# Altium PCB fan-regulator.PcbDoc
Units mm, origin at the board's own origin, x right, y up, seen from the top; angles counter-clockwise.
Board outline 152.4 x 101.6 mm, 2 copper layers (Top Layer, Bottom Layer); 23 components, 11 nets, 67 pads, 0 vias.
Unrouted connection lines stored in the file: 35.
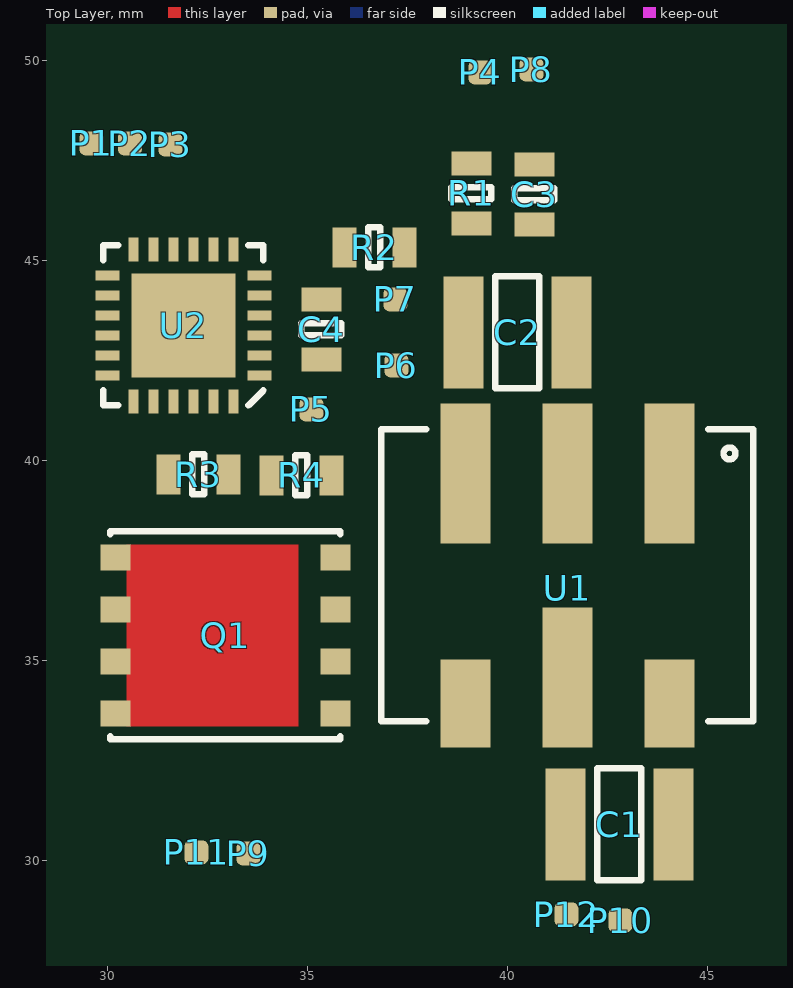
[diagram p0: Top Layer view]
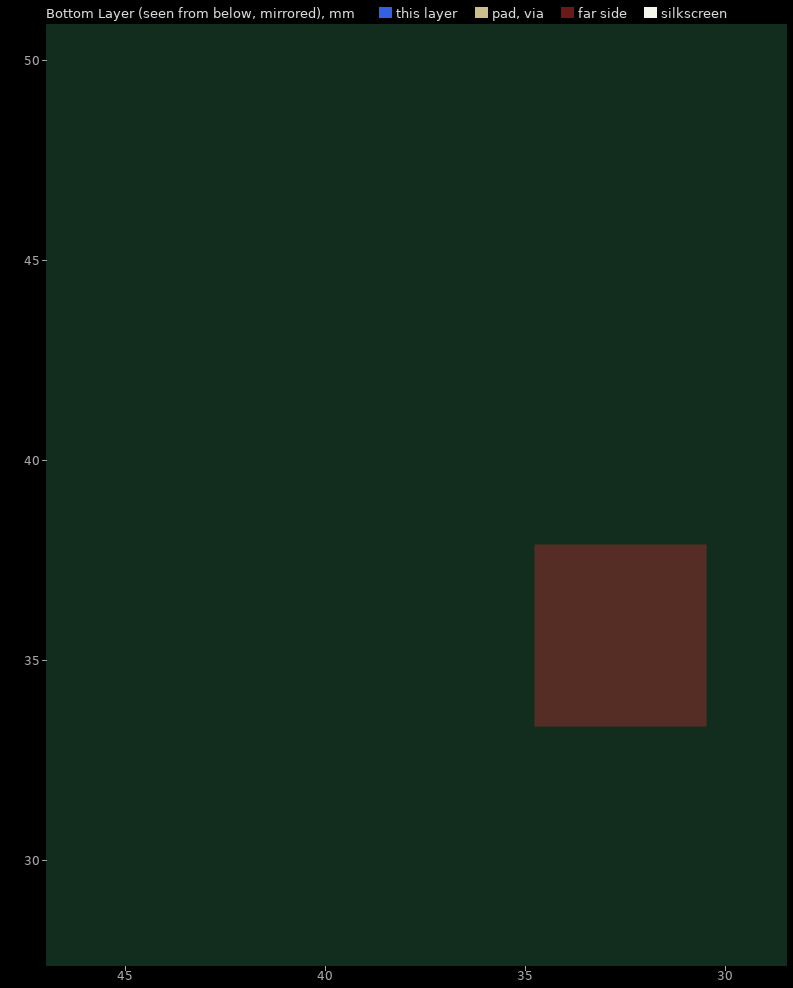
[diagram p1: Bottom Layer view, seen from below]

## Layer stack, top to bottom
Top Solder: solder mask 0.0102, Solder Resist, Dk 3.5
Top Layer: signal copper 0.0356
Dielectric 1: dielectric 0.32, FR-4, Dk 4.8
Bottom Layer: signal copper 0.0356
Bottom Solder: solder mask 0.0102, Solder Resist, Dk 3.5

## Board outline
25.4,25.4 177.8,25.4 177.8,127 25.4,127

## Design rules (kind name [scope] priority, off if disabled: settings)
Clearance [All] p1: gap=0.2 ignorepadtopadclearanceinfootprint=TRUE except(0: Arc-Hole Track-Hole SMDPad-Hole THPad-Hole Via-Hole Fill-Hole Poly-Hole Region-Hole Text-Hole)
ComponentClearance [All] p1: gap=0 collisioncheckmode=3 verticalgap=0 showdistances=FALSE
HoleSize [All] p1: absolutevalues=TRUE maxlimit=5 minlimit=0.3 maxpercent=80.000 minpercent=20.000
MinimumSolderMaskSliver [All] p1: minsoldermaskwidth=0.127
PolygonConnect [All] p1: connectstyle=Direct reliefconductorwidth=0.254 reliefentries=4 polygonreliefangle="90 Angle" airgapwidth=0.254
RoutingVias [All] p1: holewidth=0.5 width=1 viastyle="Through Hole" minholewidth=0.3 minwidth=0.6 maxholewidth=5 maxwidth=6
SilkToSilkClearance [All] p1: silktosilkclearance=0.127
SilkToSolderMaskClearance [IsPad] p1: minsilkscreentomaskgap=0.127 clearancetoexposedcopper=TRUE
SolderMaskExpansion [All] p1: expansion=0.102 istentingtop=FALSE
Width [All] p1: maxlimit=6.3 minlimit=0.2 preferedwidth=0.2 minimp=50.000000 maximp=50.000000 favimp=50.000000
25 further rules are at their usual default settings.

## Components (designator, comment, footprint, x,y, rotation, side; value= is the part's Value field where it differs from the comment)
C1 "22 μF" 1210 41.45,30.9 r0 top
C2 "22 μF" 1210 38.9,43.2 r0 top
C3 "0.1 μF" 0603 40.675,45.9 r90 top
C4 "1 μF" 0603 35.35,44.025 r270 top
P1 "1-Signal" 1-SignalSmall 29.6,47.925 r0 top
P2 "1-Signal" 1-SignalSmall 30.559,47.926 r0 top
P3 "1-Signal" 1-SignalSmall 31.575,47.9 r0 top
P4 "1-Signal" 1-SignalSmall 39.325,49.7 r0 top
P5 "1-Signal" 1-SignalSmall 35.1,41.275 r0 top
P6 "1-Signal" 1-SignalSmall 37.225,42.375 r0 top
P7 "1-Signal" 1-SignalSmall 37.2,44.025 r0 top
P8 "1-Signal" 1-SignalSmall 40.6,49.775 r0 top
P9 "1-Signal" 1-SignalSmall 33.525,30.175 r0 top
P10 "1-Signal" 1-SignalSmall 42.825,28.5 r90 top
P11 "1-Signal" 1-SignalSmall 32.225,30.2 r90 top
P12 "1-Signal" 1-SignalSmall 41.475,28.65 r90 top
Q1 "CSD17307Q5A" "SON Q5A" 35.7,33.675 r90 top
R1 "1 k" 0603 39.1,47.425 r270 top
R2 "62" 0603 35.925,45.325 r0 top
R3 "62" 0603 31.525,39.65 r0 top
R4 "10 k" 0603 35.6,39.625 r180 top
U1 "K7805MT-500R4" K78xxMT-500R4 44.05,39.675 r180 top
U2 "ATtiny1617" VQFN24 33.8,42.125 r180 top

## Footprints (in the part's own frame and the unit in brackets; to place one, negate y for a bottom-side part, rotate by r counter-clockwise, add the part's x,y. Pads: shape width x height; smd on the part's side, far side on the other; paste and mask are expansions set on the pad)
1-SignalSmall [mm]
  rrect50% 0.6x0.6 smd paste-1: 1(0,0)
0603 [mm]
  rect 0.6x1 smd: 1(0,0) 2(1.5,0)
  silkscreen extent 0.6,-0.5 0.9,0.5
1210 [mm]
  rect 1x2.8 smd: 1(0,0) 2(2.7,0)
  silkscreen extent 0.8,-1.4 1.9,1.4
K78xxMT-500R4 [mm]
  rect 1.25x3.5 smd paste-1: 1(0,0) 2(2.55,0) 3(5.1,0) 5(2.55,5.1)
  rect 1.25x2.2 smd paste-1: 4(5.1,5.75) 6(0,5.75)
  silkscreen extent -2.1,-1.1 7.2,6.2
"SON Q5A" [mm]
  rect 0.65x0.75 smd paste-1: 1(0,0) 2(1.3,0) 3(2.6,0) 4(3.9,0) 5(3.9,5.5) 6(2.6,5.5) 7(1.3,5.5) 8(0,5.5)
  Top Layer region: -0.325,0.925 4.225,0.925 4.225,5.225 -0.325,5.225
  silkscreen extent -0.65,-0.13 4.55,5.63
VQFN24 [mm]
  rect 0.6x0.25 smd: 1(0,0) 2(0,-0.5) 3(0,-1) 4(0,-1.5) 5(0,-2) 6(0,-2.5) 13(3.8,-2.5) 14(3.8,-2) 15(3.8,-1.5) 16(3.8,-1) 17(3.8,-0.5) 18(3.8,0)
  rect 0.25x0.6 smd: 7(0.65,-3.15) 8(1.15,-3.15) 9(1.65,-3.15) 10(2.15,-3.15) 11(2.65,-3.15) 12(3.15,-3.15) 19(3.15,0.65) 20(2.65,0.65) 21(2.15,0.65) 22(1.65,0.65) 23(1.15,0.65) 24(0.65,0.65)
  rect 2.6x2.6 smd paste-5: 25(1.9,-1.25)
  silkscreen extent -0.1,-3.25 3.9,0.75

## Part data
C1 C2 C3 C4: library part Cap
R1 R2 R3 R4: library part Res
U1: library part K78xxMT-500R4
U2: library part ATtiny1617/3217

## Nets (pads, with @x,y where several pads share a name; then routed paths per layer and width w, separated by ;. In a path a pad name is that pad's centre, name@x,y a point inside that pad or via, vN(x,y) a via of type N, cw(c..) or ccw(c..) an arc to the next point about the centre after c; other vN are vias at no path point)
GND: C1.1 C2.2 C3.1 C4.2 P3.1 P6.1 P8.1 P12.1 Q1.1 Q1.2 Q1.3 R4.1 U1.2 U1.5 U2.3 U2.25
NetC3_2: C3.2 P4.1 R1.1 R2.2
NetP11_1: P11.1 Q1.5 Q1.6 Q1.7 Q1.8
NetQ1_4: Q1.4 R3.2 R4.2
RXD: P1.1 U2.13
SWITCH: R3.1 U2.16
TSENSE: R2.1 U2.7
TXD: P2.1 U2.14
UPDI: P5.1 U2.23
VDD-5: C2.1 C4.1 P7.1 R1.2 U1.3 U2.4
VIN: C1.2 P9.1 P10.1 U1.1 U1.6
pads on no net: U1.4 U2.1 U2.2 U2.5 U2.6 U2.8 U2.9 U2.10 U2.11 U2.12 U2.15 U2.17 U2.18 U2.19 U2.20 U2.21 U2.22 U2.24